# Altium PCB PCB.PcbDoc
Units mm, origin at the board's own origin, x right, y up, seen from the top; angles counter-clockwise.
Board outline 53.3 x 32.3 mm, 2 copper layers (Top Layer, Bottom Layer), stack 0.325 mm thick; 74 components, 38 nets, 206 pads, 99 vias.
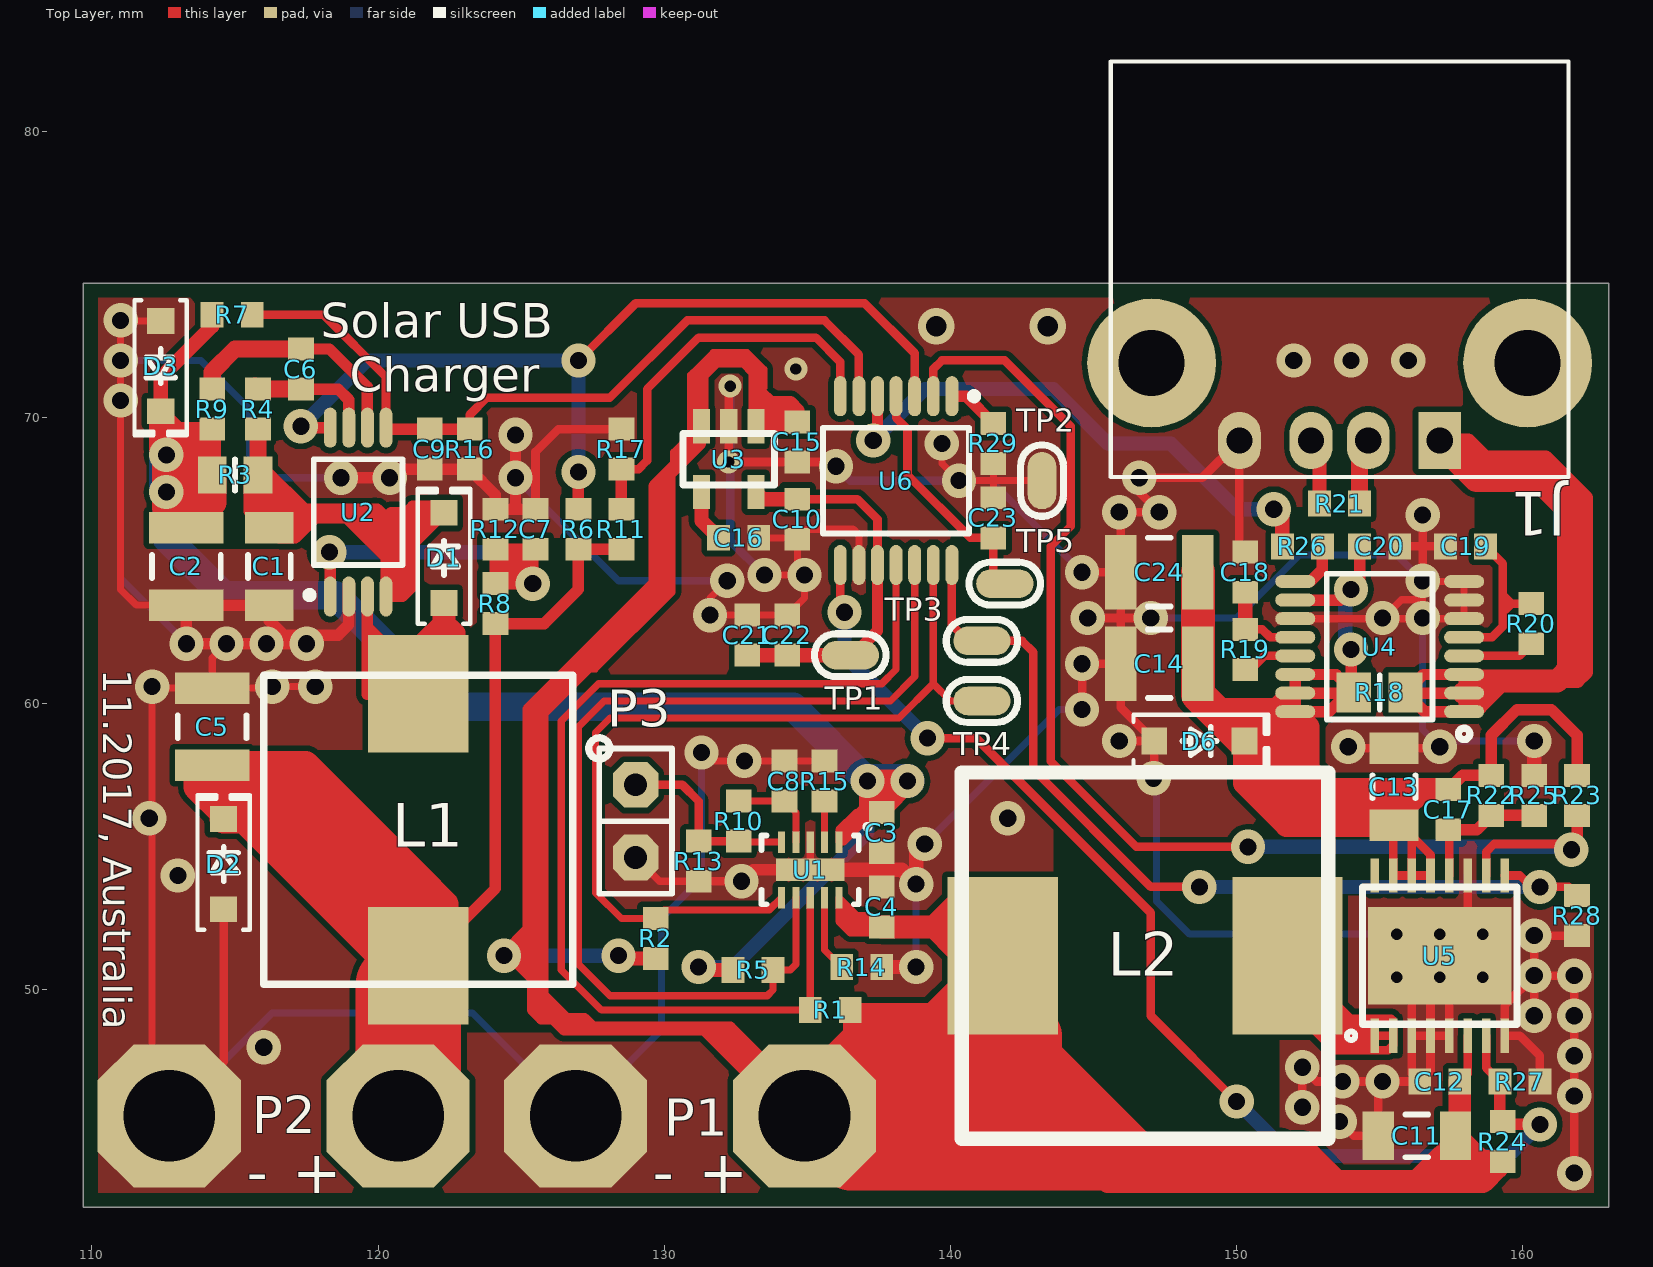
[diagram p0: Top Layer view]
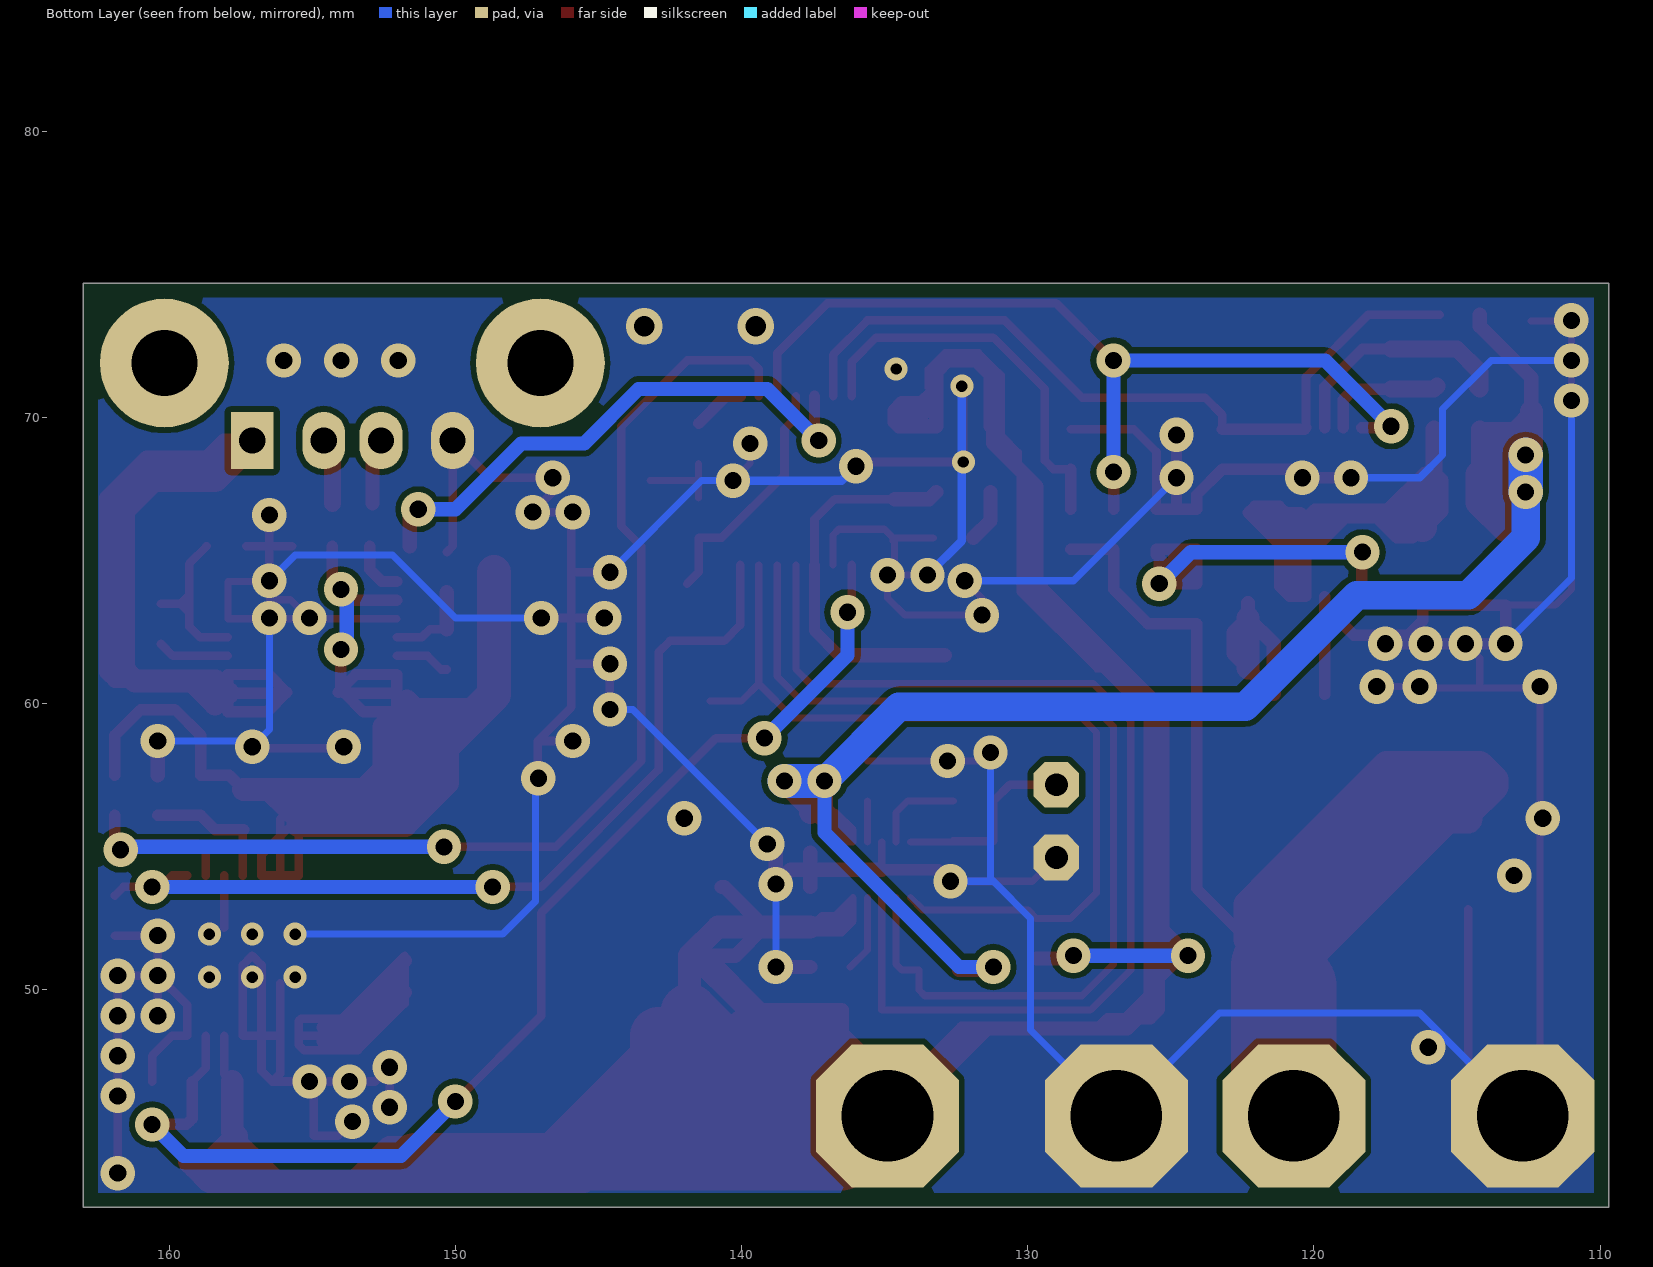
[diagram p1: Bottom Layer view, seen from below]

## Layer stack, top to bottom
Top Solder: solder mask 0.0102, Solder Resist, Dk 3.5
Top Layer: signal copper 0.0356
Dielectric 1: core 0.254, FR-4, Dk 4.2
Bottom Layer: signal copper 0.0356
Bottom Solder: solder mask 0.0102, Solder Resist, Dk 3.5

## Board outline
109.7,42.4 163,42.4 163,74.7 109.7,74.7

## Design rules (kind name [scope] priority, off if disabled: settings)
AssemblyTestPointUsage [All] p1 off:
AssemblyTestpoint [All] p1 off: testpointundercomponent=TRUE minsize=1.016 maxsize=2.54 preferedsize=1.524 minholesize=0 maxholesize=1.016 preferedholesize=0.813 testpointgrid=0.025 usegrid=TRUE gridtolerance=0 allowsidetop=TRUE allowsidebottom=TRUE
BoardOutlineClearance [All] p1: gap=0.5 ignorepadtopadclearanceinfootprint=FALSE
Clearance [All] p1: gap=0.2 ignorepadtopadclearanceinfootprint=TRUE except(0: Arc-Hole Track-Hole SMDPad-Hole THPad-Hole Via-Hole Fill-Hole Poly-Hole Region-Hole Text-Hole)
ComponentClearance ComponentClearance_R18 [InComponent('R18')] p1: gap=0 collisioncheckmode=3 verticalgap=0 showdistances=FALSE
ComponentClearance [All] p2: gap=0.25 collisioncheckmode=3 verticalgap=0.25 showdistances=FALSE
DiffPairsRouting [All] p1 off: maxlimit=0.254 minlimit=0.254 mostfreqgap=0.254 toplayer_minwidth=0.381 toplayer_maxwidth=0.381 toplayer_prefwidth=0.381 bottomlayer_minwidth=0.381 bottomlayer_maxwidth=0.381 bottomlayer_prefwidth=0.381 maxuncoupledlength=12.7
FabricationTestPointUsage [All] p1 off: valid=0 allowmultiple=FALSE
FabricationTestpoint [All] p1 off: side=3 testpointundercomponent=TRUE minsize=1.016 maxsize=2.54 preferedsize=1.524 minholesize=0 maxholesize=1.016 preferedholesize=0.813 testpointgrid=0.025 allowsidetop=TRUE allowsidebottom=TRUE usegrid=TRUE gridtolerance=0
FanoutControl Fanout_BGA [IsBGA] p1 off: bgadir=Out bgaviamode=Centered fanoutstyle=Auto fanoutdirection=Alternating viagrid=0.025 // Fanout_BGA (Default Rule)
FanoutControl Fanout_LCC [IsLCC] p2 off: bgadir=Out bgaviamode=Centered fanoutstyle=Auto fanoutdirection=Alternating viagrid=0.025 // Fanout_LCC (Default Rule)
FanoutControl Fanout_SOIC [IsSOIC] p3 off: bgadir=Out bgaviamode=Centered fanoutstyle=Auto fanoutdirection=Alternating viagrid=0.025 // Fanout_SOIC (Default Rule)
FanoutControl Fanout_Small [(CompPinCount < 5)] p4 off: bgadir=Out bgaviamode=Centered fanoutstyle=Auto fanoutdirection=OutThenIn viagrid=0.025 // Fanout_Small (Default Rule)
FanoutControl Fanout_Default [All] p5 off: bgadir=Out bgaviamode=Centered fanoutstyle=Auto fanoutdirection=Alternating viagrid=0.025 // Fanout_Default (Default Rule)
HoleSize [All] p1: absolutevalues=TRUE maxlimit=5 minlimit=0.4 maxpercent=80.000 minpercent=20.000
HoleToHoleClearance [All] p1: gap=0.5 allowstackedmicrovias=FALSE
MinimumAnnularRing [((ObjectKind = 'Pad') OR (ObjectKind = 'Via')) And (Layer = 'MultiLayer')] p1: minimumring=0.175
MinimumSolderMaskSliver [All] p1: minsoldermaskwidth=0.05
PermittedLayers [All] p1: toplayerpermitted=TRUE bottomlayerpermitted=FALSE
PlaneClearance [All] p1: clearance=0.25
PlaneConnect [All] p1: planeconnectstyle=Relief reliefexpansion=0.5 reliefentries=4 reliefconductorwidth=0.25 reliefairgap=0.25
PolygonConnect [All] p1: connectstyle=Direct reliefconductorwidth=0.254 reliefentries=4 polygonreliefangle="90 Angle" airgapwidth=0.254
RoutingCorners [All] p1: cornerstyle=45-Degree minsetback=2.5 maxsetback=2.5
RoutingVias [All] p1: holewidth=0.6 width=1.2 viastyle="Through Hole" minholewidth=0.4 minwidth=0.8 maxholewidth=1 maxwidth=2
SilkToSilkClearance [All] p1 off: silktosilkclearance=0.2
SilkToSolderMaskClearance [IsPad] p1 off: minsilkscreentomaskgap=0.2 clearancetoexposedcopper=TRUE
SolderMaskExpansion [All] p1: expansion=0.1
UnConnectedPin [All] p1:
UnRoutedNet [All] p1: checkbadconnections=TRUE
Width [All] p1: maxlimit=5 minlimit=0.2 preferedwidth=0.25
10 further rules are at their usual default settings.

## Components (designator, comment, footprint, x,y, rotation, side; value= is the part's Value field where it differs from the comment)
C1 "" C1206 116.2,64.8 r270 top value=4.7uF
C2 "" C1210 113.3,64.8 r270 top value=22uF
C3 "" 1608[0603] 137.6,55.5 r270 top value=1uF
C4 "" 1608[0603] 137.6,52.9 r90 top value=1uF
C5 "" C1210 114.2,59.2 r90 top value=22uF
C6 "" 1608[0603] 117.3,71.7 r270 top value=1uF
C7 "" 1608[0603] 125.5,66.1 r270 top value=100nF
C8 "" 1608[0603] 134.2,57.3 r270 top value=100nF
C9 "" 1608[0603] 121.8,68.9 r90 top value=1nF
C10 "" 1608[0603] 134.65,66.45 r270 top value=1uF
C11 "" C1206 156.3,44.9 r180 top value=10uF
C12 "" 1608[0603] 157.1,46.8 r180 top value=100nF
C13 "" C1206 155.5,57.1 r90 top value=2.2uF
C14 "Cap Pol1" C1210 147.3,61.4 r180 top value=150uF
C15 "" 1608[0603] 134.65,69.15 r90 top value=1uF
C16 "" 1608[0603] 132.6,65.8 r180 top value=100nF
C17 "" 1608[0603] 157.4,56.3 r90 top value=DNP
C18 "" 1608[0603] 150.3,64.6 r270 top value=100nF
C19 "" 1608[0603] 158,65.5 r0 top value=100nF
C20 "" 1608[0603] 155,65.5 r180 top value=100nF
C21 "" 1608[0603] 132.9,62.4 r90 top value=1uF
C22 "" 1608[0603] 134.3,62.4 r90 top value=100nF
C23 "" 1608[0603] 141.5,66.5 r270 top value=100nF
C24 "Cap Pol1" C1210 147.3,64.6 r180 top value=optional
D1 "D Schottky" SOD-123 122.3,65.1 r90 top value="(optional Schottky)"
D2 "D Zener" SOD-123 114.6,54.4 r90 top value="5.1V Zener"
D3 "D Zener" SOD-123 112.4,71.8 r270 top value="5.1V Zener"
D6 "D Zener" SOD-123 148.7,58.7 r0 top value="5.6V Zener"
J1 "USB B" USB 153.6,69.2 r90 top value=USBR-A-S-S-O-TH
L1 "Inductor" SRP1038A 121.4,55.6 r90 top value=10uH
L2 "Inductor" DR127 146.8,51.2 r0 top value=6.8uH
P1 "Battery single cell" BATTERY 130.9,45.6 r180 top
P2 "Solar Panel" SOLAR 116.7,45.6 r180 top
P3 "NTC Thermistor" Thermistor 129,55.9 r270 top
R1 "Res2" 1608[0603] 135.8,49.3 r0 top value=100k
R2 "Res2" 1608[0603] 129.7,51.8 r270 top value=100k
R3 "Res2" 6-0805_L 115,68 r180 top value="0.05R 1%"
R4 "Res2" 1608[0603] 115.8,70.3 r270 top value=1k
R5 "Res2" 1608[0603] 133.1,50.7 r0 top value=200k
R6 "Res2" 1608[0603] 127,66.1 r90 top value=100k
R7 "Res2" 1608[0603] 114.9,73.6 r180 top value="315k 1%"
R8 "Res2" 1608[0603] 124.1,63.5 r90 top value=100k
R9 "Res2" 1608[0603] 114.2,70.3 r270 top value=1k
R10 "Res2" 1608[0603] 132.6,55.9 r270 top value=TBD
R11 "Res2" 1608[0603] 128.5,66.1 r90 top value=TBD
R12 "Res2" 1608[0603] 124.1,66.1 r270 top value=DNP
R13 "Res2" 1608[0603] 131.2,54.5 r90 top value=DNP
R14 "Res2" 1608[0603] 136.9,50.8 r180 top value="4.7k 1%"
R15 "Res2" 1608[0603] 135.6,57.3 r270 top value="650R 1%"
R16 "Res2" 1608[0603] 123.2,68.9 r90 top value="125k 1%"
R17 "Res2" 1608[0603] 128.5,68.9 r90 top value=TBD
R18 "Res2" 6-0805_N 155,60.4 r180 top value=DNP
R19 "Res2" 1608[0603] 150.3,61.9 r90 top value=1k
R20 "Res2" 1608[0603] 160.3,62.8 r270 top value=1k
R21 "Res2" 1608[0603] 153.6,67 r180 top value=200R
R22 "Res2" 1608[0603] 158.9,56.8 r90 top value=DNP
R23 "Res2" 1608[0603] 161.9,56.8 r90 top value=1.96M
R24 "Res2" 1608[0603] 159.3,44.7 r270 top value="1.96M 1%"
R25 "Res2" 1608[0603] 160.4,56.8 r270 top value=DNP
R26 "Res2" 1608[0603] 152.3,65.5 r180 top value=1k
R27 "Res2" 1608[0603] 159.9,46.8 r180 top value="390k 1%"
R28 "Res2" 1608[0603] 161.9,52.6 r90 top value=100k
R29 "Res2" 1608[0603] 141.5,69.1 r90 top value=100k
TP1 "VDD" "Testpoint 1x2mm" 136.5,61.7 r90 top
TP2 "GND" "Testpoint 1x2mm" 143.2,67.8 r0 top
TP3 "SWCLK" "Testpoint 1x2mm" 141.1,62.2 r90 top
TP4 "SWDIO" "Testpoint 1x2mm" 141.1,60.1 r270 top
TP5 "NRST" "Testpoint 1x2mm" 141.9,64.2 r270 top
U1 "*" BQ24210 135.1,54.2 r270 top value=BQ24210
U2 "SPV1040" SPV1040 119.3,66.7 r90 top
U3 "LDK120" LDK120-SOT23-5L 132.25,68.55 r180 top value=LDK120M25R
U4 "INA250" INA250 155,62 r180 top value=INA2504A
U5 "TPS61032" TPS6103XPWP 157.1,51.2 r0 top value=TPS61032PWP
U6 "STM32L011x3" STM32L011x3 138.1,67.8 r270 top value=STM32L011D3

## Footprints (in the part's own frame and the unit in brackets; to place one, negate y for a bottom-side part, rotate by r counter-clockwise, add the part's x,y. Pads: shape width x height; smd on the part's side, far side on the other; paste and mask are expansions set on the pad)
6-0805_L [mm] "Chip Resistor, Body 2.0x1.2mm, IPC High Density"
  rect 1x1.3 smd: 1(-0.8,0) 2(0.8,0)
  silkscreen extent 0,-0.55 0,0.55, body extent -1.07,-0.7 1.07,0.7, height 0.7
6-0805_N [mm] "Chip Resistor, Body 2.0x1.2mm, IPC Medium Density"
  rect 1.2x1.4 smd paste-100: 1(-0.9,0) 2(0.9,0)
  silkscreen extent 0,-0.6 0,0.6, body extent -1.07,-0.7 1.07,0.7, height 0.7
1608[0603] [mm] "Chip Capacitor, Body 1.6x0.8mm, IPC High Density"
  rect 0.8x0.9 smd: 1(-0.7,0) 2(0.7,0)
  body extent -0.87,-0.48 0.87,0.48, height 1.3
BATTERY [mm]
  oct 5x5 hole 3.2: 1(-4,0) 2(4,0)
BQ24210 [mm] "WSON, 10-Leads, Body 3.00x2.00mm, Pitch 0.50mm, Thermal Pad 2.40x0.79mm, IPC Medium Density"
  rect 0.75x0.25 smd: 1(-0.97,1) 2(-0.97,0.5) 3(-0.97,0) 4(-0.97,-0.5) 5(-0.97,-1) 6(0.97,-1) 7(0.97,-0.5) 8(0.97,0) 9(0.97,0.5) 10(0.97,1)
  rect 0.79x2.4 smd paste-0.06: PAD(0,0)
  silkscreen extent -1.6,-1.7 1.2,2.1, body extent -1.05,-1.55 1.05,1.55, height 0.8
C1206 [mm] "Chip Capacitor, Body 3.2x1.6mm, IPC High Density"
  rect 1.1x1.7 smd: 1(-1.35,0) 2(1.35,0)
  silkscreen extent -0.4,-0.75 0.4,0.75, body extent -1.7,-0.9 1.7,0.9, height 1.3
C1210 [mm] "Chip Capacitor, Body 3.2x2.5mm, IPC High Density"
  rect 1.1x2.6 smd: 1(-1.35,0) 2(1.35,0)
  silkscreen extent -0.4,-1.2 0.4,1.2, body extent -1.7,-1.35 1.7,1.35, height 1.3
DR127 [mm]
  rect 3.85x5.5 smd paste-0.2: 1(-4.975,0) 2(4.975,0)
  silkscreen extent -6.4,-6.4 6.4,6.4, body extent -6.25,-6.25 6.25,6.25, height 8
INA250 [mm] "TTSOP, 16-Leads, Body 5.00x4.40mm, Pitch 0.65mm, IPC Medium Density"
  oval 1.4x0.45 smd: 1(-2.95,2.275) 2(-2.95,1.625) 3(-2.95,0.975) 4(-2.95,0.325) 5(-2.95,-0.325) 6(-2.95,-0.975) 7(-2.95,-1.625) 8(-2.95,-2.275) 9(2.95,-2.275) 10(2.95,-1.625) 11(2.95,-0.975) 12(2.95,-0.325) 13(2.95,0.325) 14(2.95,0.975) 15(2.95,1.625) 16(2.95,2.275)
  silkscreen extent -3.15,-2.55 1.85,3.25, body extent -2.25,-2.55 2.25,2.55, height 1.2
LDK120-SOT23-5L [mm]
  rect 0.6x1.2 smd: 1(-0.95,-1.15) 2(0,-1.15) 3(0.95,-1.15) 4(0.95,1.15) 5(-0.95,1.15)
  silkscreen extent -1.6,-0.9 1.6,0.9, body extent -1.48,-0.8 1.47,0.8, height 1.45
SOD-123 [mm] "SOD, 2-Leads, Body 1.55x3.70mm, IPC Medium Density"
  rect 0.9x0.95 smd: 1(-1.575,0) 2(1.575,0)
  silkscreen extent -2.3,-0.92 2.41,0.92, body extent -1.86,-0.78 1.86,0.77, height 1.35
SOLAR [mm]
  oct 5x5 hole 3.2: 1(-4,0) 2(4,0)
SPV1040 [mm] "TSSOP8; 8-Leads, Body 3.00x4.40mm, Pitch 0.65mm, IPC Medium Density"
  oval 1.4x0.45 smd: 1(-2.95,0.975) 2(-2.95,0.325) 3(-2.95,-0.325) 4(-2.95,-0.975) 5(2.95,-0.975) 6(2.95,-0.325) 7(2.95,0.325) 8(2.95,0.975)
  silkscreen extent -3.02,-1.55 1.85,1.82, body extent -2.25,-1.55 2.25,1.55, height 1.2
SRP1038A [mm]
  rect 4.1x3.5 smd paste-0.2: 1(-4.75,0) 2(4.75,0)
  silkscreen extent -5.4,-5.4 5.4,5.4, body extent -5.15,-5.15 5.15,5.15, height 4
STM32L011x3 [mm] "TSSOP14, 14-Leads, Body 5.00x4.40mm, Pitch 0.65mm, IPC Medium Density"
  oval 1.4x0.45 smd: 1(-2.95,1.95) 2(-2.95,1.3) 3(-2.95,0.65) 4(-2.95,0) 5(-2.95,-0.65) 6(-2.95,-1.3) 7(-2.95,-1.95) 8(2.95,-1.95) 9(2.95,-1.3) 10(2.95,-0.65) 11(2.95,0) 12(2.95,0.65) 13(2.95,1.3) 14(2.95,1.95)
  silkscreen extent -3.07,-2.55 1.85,2.85, body extent -2.25,-2.55 2.25,2.55, height 1.2
"Testpoint 1x2mm" [mm]
  oval 1x2 smd paste-100: 1(0,0)
  silkscreen extent -0.75,-1.25 0.75,1.25
Thermistor [mm]
  oct 1.6x1.6 hole 0.8: 1(-1.27,0) 2(1.27,0)
  silkscreen extent -2.54,-1.27 2.54,1.27
TPS6103XPWP [mm]
  rect 0.3x1.2 smd: 1(-2.275,-2.8) 2(-1.625,-2.8) 3(-0.975,-2.8) 4(-0.325,-2.8) 5(0.325,-2.8) 6(0.975,-2.8) 7(1.625,-2.8) 8(2.275,-2.8) 9(2.275,2.8) 10(1.625,2.8) 11(0.975,2.8) 12(0.325,2.8) 13(-0.325,2.8) 14(-0.975,2.8) 15(-1.625,2.8) 16(-2.275,2.8)
  rect 5x3.4 smd paste-100: PAD(0,0)
  silkscreen extent -3.25,-2.95 2.7,2.4, body extent -2.55,-2.25 2.55,2.25, height 1.45
USB [mm]
  round 4.5 hole 2.3 paste-1.67: 0(2.71,6.57) 0(2.71,-6.57)
  rect 2x1.5 hole 0.92 paste-1.67: 1(0,-3.5)
  oval 2x1.5 hole 0.92 paste-1.67: 2(0,-1) 3(0,1) 4(0,3.5)
  silkscreen extent -1.27,-8 13.25,8, body extent -1.15,-7.85 13.15,7.85, height 7.65

## Part data
C1 C2 C3 C4 C5 C6 C7 C8 C9 C10 C11 C12 C13 C15 C16 C17 C18 C19 C20 C21 C22 C23: library part Cap, "Capacitor"
C14 C24: "Polarized Capacitor"
D1: "Schottky Diode"
D2 D3 D6: "Zener Diode"
J1: library part "USB 2.0 Type B", Farnell code=1753808, Link farnell=http://au.element14.com/samtec/usbr-a-s-s-o-th/usb-2-0-type-a-receptacle-th/dp/1753808
L1: Manufacturer=Bourns, Info=SRP1038A-100M, Mouser link=http://au.mouser.com/ProductDetail/Bourns/SRP1038A-100M/
P1 P2 P3: library part "Header 2", "Header, 2-Pin", LatestRevisionDate=17-Jul-2002, LatestRevisionNote="Re-released for DXP Platform.", Publisher="Altium Limited"
R1 R2 R3 R4 R5 R6 R7 R8 R9 R10 R11 R12 R13 R14 R15 R16 R17 R18 R19 R20 R21 R22 R23 R24 R25 R26 R27 R28 R29: "Resistor"
  R3: Info="min. 100mW"
TP1 TP2 TP3 TP4 TP5: library part Testpoint, "Testpoint for measuring at the PCB"
U1: library part BQ24210, "800-mA, Single-Input, Single-Cell Li-Ion Battery Solar Charger", Manufacturer="Texas Instruments", Link mouser=http://www.mouser.com/ProductDetail/Texas-Instruments/BQ24210DQCT/
U2: Manufacturer=STM, Link mouser=http://www.mouser.de/ProductDetail/STMicroelectronics/SPV1040TTR/
U3: "200 mA low quiescent current very low noise LDO", Manufacturer=ST, Info="Pinout for SOT23-5L, SOT323-5L only!", Mouser link=http://au.mouser.com/ProductDetail/STMicroelectronics/LDK120M25R/
U4: "36-V, Low- or High-Side, Bidirectional, Zero-Drift  Current-Shunt Monitor with Precision Integrated Shunt Resistor", Manufacturer="Texas Instruments", Mouser link=http://au.mouser.com/ProductDetail/Texas-Instruments/INA250A4PWR/, Note="Applies to INA250A1, INA250A2, INA250A3, INA250A4"
U5: "Efficient Synchronous Boost Converter With 4A Switch", Manufacturer="Texas Instruments", Mouser link=http://au.mouser.com/ProductDetail/Texas-Instruments/TPS61032PWPR/
U6: "MCU", Manufacturer=ST, Info="only TSSOP14 footprint", Mouser link=http://au.mouser.com/ProductDetail/STMicroelectronics/STM32L011D3P6TR/
L2: Info=DR127-6R8-R, Mouser link=http://au.mouser.com/ProductDetail/Eaton/DR127-6R8-R/

## Via types
v1: diameter 1.2, hole 0.6, Top Layer to Bottom Layer, tented top, 37 vias
v2: diameter 1.2, hole 0.6, Top Layer to Bottom Layer, tented both sides, 28 vias
v3: diameter 1.2, hole 0.6, Top Layer to Bottom Layer, 23 vias
v4: diameter 0.8, hole 0.4, Top Layer to Bottom Layer, tented top, 5 vias
v5: diameter 0.8, hole 0.4, Top Layer to Bottom Layer, 3 vias
v6: diameter 1.27, hole 0.711, Top Layer to Bottom Layer, tented both sides, 2 vias
v7: diameter 0.8, hole 0.4, Top Layer to Bottom Layer, tented both sides, 1 vias

## Nets (pads, with @x,y where several pads share a name; then routed paths per layer and width w, separated by ;. In a path a pad name is that pad's centre, name@x,y a point inside that pad or via, vN(x,y) a via of type N, cw(c..) or ccw(c..) an arc to the next point about the centre after c; other vN are vias at no path point)
2.5V: C10.1 C21.1 C22.1 TP1.1 U3.5 U6.10 | length 13.4
  Top Layer w0.3: C10.1 136.75,67.15 137.45,66.45 U6.10
  Top Layer w0.4: TP1.1 136.6,61.7 137.45,62.55 U6.10
  Top Layer w0.5: C21.1 C22.1 TP1.1 ; U3.5 133.45,67.15 C10.1
5V: C13.1 C14.1 C17.2 C20.2 C24.1 D6.2 R18.2 R22.2 R23.2 U4.10 U4.14 U4.15 U4.16 U5.13 U5.14 U5.15 | length 68.9
  Top Layer w0.3: 155.8,56.3 156.125,55.975 C13.1@156.125,55.375 ; U5.14 U5.15 155.475,55.725 C13.1 155.75,55.75 C13.1@156.125,55.375 ; U5.14 U5.13 156.775,54.725 C13.1@156.125,55.375 ; U5.14 C13.1@156.125,55.375
  Top Layer w0.4: U4.10 153.625,63.625 v3(154,64) 154.3,64.3 C20.2 ; v3(154,61.9) R18.2@154,60.5 ; R18.2 R18.2@154,60.5 ; C17.2 157.9,57.5 R22.2 158.9,58.9 159.8,59.8 161,59.8 161.9,58.9 R23.2 ; U4.15 U4.16 153.225,59.725 R18.2@153.875,60.375 ; U4.15 U4.14 153.475,61.025 R18.2@154,60.5 ; U4.15 R18.2@153.875,60.375 ; R18.2@153.875,60.375 R18.2@154,60.5
  Top Layer w0.8: 149.137,59.837 149.175,59.8 150.5,59.8 ; D6.2 150.275,57.225 151.75,55.75 C13.1 155.5,56 155.8,56.3 ; 151.7,60.1 151.4,59.8 150.5,59.8 ; 152.5,59.2 152.5,57.7 153.2,57 156.5,57 ; C17.2 156.5,57 ; 150.5,59.8 150.9,59.4 ; 150.9,59.4 150.9,57.5 152.1,56.3 153,56.3 ; 150.9,59.4 152,59.4 151.7,59.1 151.7,57.6 153,56.3 ; 153,56.3 155.8,56.3 ; 155.8,56.3 156.5,57
  Top Layer w1.2: C24.1 C14.1 148.65,60.325 149.137,59.837 ; 149.175,59.8 D6.2
  Bottom Layer w0.5: v3(154,61.9) 153.8,62.1 153.8,63.8 v3(154,64)
GND: C1.2 C2.2 C3.2 C4.2 C5.2 C7.1 C8.1 C9.1 C10.2 C11.2 C12.2 C13.2 C14.2 C15.1 C16.1 C18.1 C19.1 C20.1 C21.2 C22.2 C23.1 C24.2 D2.1 D3.1 D6.1 J1.4 P1.2 P2.2 P3.2 R12.1 R13.1 R14.1 R15.1 R16.1 R17.2 R25.1 R27.1 R28.1 R29.1 TP2.1 U1.3 U1.PAD U2.2 U3.2 U4.6 U4.7 U4.8 U4.11 U5.3 U5.4 U5.5 U5.8 U5.11 U5.PAD U6.9 | length 329.6
  Top Layer w0.25: D3.1 111.025,73.375 v1(111,73.4) v1(111,72) v1(111,70.6) 111,64 111.55,63.45 C2.2 ; P2.2 112.1,46.2 v1(112.1,60.6) 112.15,60.55 C5.2 ; v2(114.7,62.1) 114.2,61.6 C5.2 ; v1(117.8,60.6) v1(116.3,60.6) 116.25,60.55 C5.2 ; P3.2 129.83,53.8 R13.1 ; v1(131.3,58.3) 131.6,58 v1(132.8,58) C8.1 R15.1 ; v2(132.2,64.3) 131.6,63.7 v1(131.6,63.1) C21.2 C22.2 134.9,63.7 v1(134.9,64.5) ; C16.1 134.6,65.8 C10.2 ; v2(133.5,64.5) v1(134.9,64.5) ; C10.2@134.7,65.7 C10.2 ; U1.PAD U1.3 ; U6.9 136.8,65.9 136.6,66.1 135,66.1 C10.2 ; v2(139.7,69.1) 139.7,68.4 v2(140.3,67.8) 141.5,67.8 ; C23.1 141.5,67.8 ; R29.1 141.5,67.8 ; TP2.1 141.5,67.8 ; U4.11 v2@155.1,62.975 ; C10.2 134.65,64.75 v1(134.9,64.5) ; v2@155.1,62.975 v2@156.5,62.975 ; v2@155.1,62.975 155.762,63.637 156.5,63.637 ; v2@156.5,62.975 U4.6 U4.7 U4.8 156.525,64.275 v2(156.5,64.3) 156.5,63.637 ; v2@156.5,62.975 v2(156.5,63) 156.5,63.637
  Top Layer w0.3: P2.2 114.6,47.5 D2.1 ; C7.1 125.5,68.8 126.3,69.6 R17.2 ; R13.1 v1(132.7,53.8) ; v4(132.3,71.1) 132.25,71.05 U3.2 v7(132.25,68.45) C15.1 135.85,68.45 v1(136,68.3) ; v1(144.6,59.8) v1(144.6,61.4) C14.2 ; v1(144.6,64.6) C24.2 ; v1(144.8,63) 145.95,63 ; v1(145.9,58.7) D6.1 ; v1(147,63) 145.95,63 ; v1(147.1,57.4) 147.125,57.425 D6.1 ; C18.1 150.1,65.5 J1.4 148.8,67.9 v1(146.6,67.9) 146.6,67.4 v2(147.3,66.7) v2(145.9,66.7) 145.95,66.65 C24.2 ; v2(152.3,45.9) v2(152.3,47.3) 152.8,46.8 v2(153.7,46.8) v1(155.1,46.8) ; v2(153.6,45.4) 154.1,44.9 C11.2 154.95,46.65 v1(155.1,46.8) ; v1(153.9,58.5) 153.95,58.45 C13.2 157.05,58.45 v1(157.1,58.5) ; C20.1 156.5,65.5 ; U5.PAD@156.125,50.225 U5.3 ; v2(156.5,64.3) 156.5,65.5 ; v1(156.5,66.6) 156.5,65.5 ; C19.1 156.5,65.5 ; U5.PAD@158.075,52.175 U5.11 ; v2(160.4,49.1) v1(160.4,50.5) ; R27.1 160.6,47.7 159.9,48.4 U5.8 159.375,49.475 v1(160.4,50.5) ; v1(161.8,43.6) v1(161.8,46.3) v2(161.8,47.7) v1(161.8,49.1) v2(161.8,50.5) v1(160.4,50.5) ; R28.1 v2(160.4,51.9) v1(160.4,50.5) ; C14.2 145.95,59.875 D6.1 ; C14.2 145.95,63 ; 145.95,63 C24.2 ; v1(155.1,46.8) C12.2 ; U5.3 156.125,47.075 C12.2 ; U5.3 U5.4 ; C12.2 156.775,47.175 U5.4 ; U5.4 156.775,50.875 U5.PAD 157.425,50.875 U5.5 U5.4
  Top Layer w0.4: v2(117.5,62.1) v2(116.1,62.1) v2(114.7,62.1) v1(113.3,62.1) C2.2 C1.2 116.2,62.9 116.7,62.4 118.6,62.4 118.975,62.775 U2.2 ; v1(118.7,67.9) v1(120.4,67.9) 120.7,68.2 C9.1 R16.1 124.1,67.3 R12.1 124.8,66.8 ; v1(124.8,69.4) v1(124.8,67.9) 124.8,66.8 ; C7.1 124.8,66.8 ; v1(132.7,53.8) 133.1,54.2 U1.PAD
  Top Layer w0.5: U1.PAD 137.6,54.2 ; R14.1 v1(138.8,50.8) ; C4.2 137.6,54.2 ; C3.2 137.6,54.2 ; v1(139.1,55.1) 138.8,54.8 v2(138.8,53.7) 138.3,54.2 137.6,54.2 ; R25.1 v1(160.4,58.7)
  Bottom Layer w0.25: v1(111,70.6) 111,64.4 v1(113.3,62.1) ; v1(111,72) 113.8,72 115.5,70.3 115.5,68.7 116.3,67.9 v1(118.7,67.9) ; P2.2 116.3,49.2 123.3,49.2 P1.2 129.9,48.6 129.9,52.5 131.2,53.8 ; v1(124.8,67.9) 128.4,64.3 v2(132.2,64.3) ; v1(131.3,58.3) 131.3,53.9 131.2,53.8 ; v1(132.7,53.8) 131.2,53.8 ; v1(138.8,50.8) v2(138.8,53.7) ; v1(139.1,55.1) 143.8,59.8 v1(144.6,59.8) ; v2(139.7,69.1) v2@139.8,69 ; v2(140.3,67.8) 141.4,67.8 v1(144.6,64.6) ; v1(147,63) 150,63 152.2,65.2 155.6,65.2 v2(156.5,64.3) ; v1(147.1,57.4) 147.2,57.3 147.2,53.1 148.35,51.95 v4(155.6,51.95) ; v2(156.5,63) 156.5,59.1 v1(157.1,58.5) 157.3,58.7 v1(160.4,58.7)
  Bottom Layer w0.3: v4(132.3,71.1) 132.3,65.7 v2(133.5,64.5) ; v1(136,68.3) 136.5,67.8 v2(140.3,67.8)
  other v2: 116,48 113,54 112,56 142,56 155.1,63 152,72 154,72 156,72
  other v4: 155.6,50.45 158.6,50.45 158.6,51.95
  other v5: 157.1,50.45 157.1,51.95 134.6,71.7
  other v6: 139.5,73.2 143.4,73.2
NetC1_1: C1.1 D1.2 R3.1 R4.2 U2.4 | length 40.9
  Top Layer w0.4: R3.1 R3.1@116.2,67.6 ; 116.2,66.8 117.3,66.8 119.8,66.8 ; 120.5,66.1 120.188,66.413 ; 120.6,66.3 120.975,66.675 ; 120.8,64.1 120.8,65.7 121.775,66.675 ; 121.2,66.4 120.563,65.763 120.563,63.75 ; C1.1 116.55,66.5 117.8,66.5 ; C1.1 117.45,66.15 ; C1.1 116.55,65.8 117.1,65.8 117.45,66.15 ; 117.45,66.15 117.8,66.5 ; 117.8,66.5 118.9,66.5 ; 118.9,66.5 120.275,65.125 ; 118.9,66.5 119.2,66.5 ; 119.2,66.5 120.275,65.425 ; 119.2,66.5 119.7,66.5 119.988,66.213 ; 119.8,66.8 119.975,66.8 120.275,66.5 ; 119.8,66.8 120.188,66.413 ; 119.988,66.213 120.275,65.925 120.275,65.425 ; 119.988,66.213 120.188,66.413 ; 120.188,66.413 120.275,66.5 ; 120.275,65.125 U2.4 120.563,63.75 ; 120.275,65.125 120.275,65.425 ; 120.275,66.5 120.45,66.675 120.975,66.675 ; 120.563,63.75 120.85,63.75 121.2,64.1 121.2,65.575 D1.2 ; 120.975,66.675 121.775,66.675 ; 120.975,66.675 121.2,66.9 122.075,66.9 D1.2 ; 121.775,66.675 D1.2
  Top Layer w0.6: R4.2 R3.1 ; C1.1 115.6,66.75 115.6,67.8 R3.1 ; 117.3,66.8 116.1,68 R3.1
  Top Layer w1: C1.1 116.2,66.8 R3.1@116.2,67.6
NetC5_1: C5.1 D2.2 L1.1 P2.1 R6.1 R8.1 R11.1 | length 78.2
  Top Layer w0.4: L1.1 122.3,51.75 124.1,53.55 R8.1 125.8,62.8 127,64 R6.1 R11.1
  Top Layer w1: L1.1@120.7,50.15 L1.1@120.7,50.85 ; L1.1@122.3,51.75 122.3,53 121.4,53.9 ; C5.1 C5.1@114.6,57.45 ; C5.1 117.45,57.85 121.4,53.9 ; C5.1 113.7,57.35 113.7,57.1 D2.2@114.6,56.2 ; D2.2@114.6,56.2 D2.2 115.325,55.975 ; D2.2@114.6,56.2 114.6,56.713 ; 114.6,56.713 115.987,56.713 116.725,55.975 ; 114.6,56.713 C5.1@114.6,57.45 ; C5.1@114.6,57.45 116.45,57.45 L1.1@121.4,52.5 ; 115.325,55.975 120.45,50.85 L1.1@120.7,50.85 ; 115.325,55.975 116.725,55.975 ; 116.725,55.975 120.7,52 L1.1@120.7,50.85 ; L1.1@120.7,50.85 L1.1 L1.1@121.4,52.5 ; L1.1@121.4,52.5 121.4,53.9
  Top Layer w3: P2.1 120.7,50.15 L1.1 121.4,46.3 P2.1
NetC6_1: C6.1 R9.1 U2.6 | length 8.5
  Top Layer w0.4: C6.1 118.3,72.4 119.625,71.075 U2.6
  Top Layer w0.6: R9.1@114.3,71.1 R9.1 114.2,71.6 115,72.4 C6.1
NetC6_2: C6.2 R4.1 U2.7 | length 4.4
  Top Layer w0.4: C6.2 118.6,71 118.975,70.625 U2.7
  Top Layer w0.6: R4.1@115.7,71.1 R4.1 C6.2
NetC7_2: C7.2 R8.2 R12.2 U2.1 | length 17.7
  Top Layer w0.4: v3(118.3,65.3) 118.325,65.275 U2.1 ; 125.1,64.8 C7.2@125.4,65.1 ; R8.2 R12.2 R12.2@124.5,65.4 ; R8.2 124.5,64.6 R12.2@124.5,65.4 ; R8.2 R8.2@124.5,64.2 ; R8.2@124.5,64.2 124.9,64.6 124.9,65.4 ; R8.2@124.5,64.2 v3(125.4,64.2) C7.2@125.4,65.1 ; R12.2@124.5,65.4 124.9,65.4 ; 124.9,65.4 C7.2@125.4,65.4 ; C7.2@125.4,65.1 C7.2@125.4,65.4 ; C7.2@125.4,65.1 125.5,65.2 C7.2 C7.2@125.4,65.4
  Bottom Layer w0.5: v3(118.3,65.3) 124.3,65.3 v3(125.4,64.2)
NetC8_2: C8.2 R10.1 U1.4 | length 3.2
  Top Layer w0.25: R10.1 C8.2 134.6,56.2 U1.4
NetC9_2: C9.2 R7.1 R16.2 U2.5 U6.6 | length 27.7
  Top Layer w0.3: R7.1 118.1,73.6 120.275,71.425 U2.5 ; R16.2 123.2,70.1 123.8,70.7 128.1,70.7 130.8,73.4 135.6,73.4 136.8,72.2 U6.6
  Top Layer w0.4: U2.5 120.325,69.6 C9.2 R16.2
NetC16_2: C16.2 U3.4 | length 1.8
  Top Layer w0.5: U3.4 131.3,66.4 C16.2
NetC17_1: C17.1 R22.1 R25.2 U5.12 | length 4.8
  Top Layer w0.3: C17.1 157.425,55.575 U5.12
  Top Layer w0.4: C17.1 158.4,55.6 R22.1 R25.2
NetC18_2: C18.2 R19.2 U4.12 | length 3.2
  Top Layer w0.3: R19.2 150.9,62.6 151.175,62.325 U4.12
  Top Layer w0.5: R19.2 C18.2
NetC19_2: C19.2 R20.1 U4.5 | length 6.1
  Top Layer w0.3: U4.5 158.925,62.325 159.3,62.7 159.3,63.2 ; C19.2 159.3,64.9 159.3,63.8 ; R20.1 159.6,63.5 ; 159.3,63.2 159.3,63.8 ; 159.3,63.2 159.6,63.5 ; 159.3,63.8 159.6,63.5
NetC23_2: C23.2 TP5.1 U6.4 | length 8.6
  Top Layer w0.3: U6.4 138.1,70 138.5,69.6 138.5,68 140.7,65.8 C23.2 141.5,64.6 TP5.1
NetD1_1: D1.1 L1.2 U2.3 | length 14.7
  Top Layer w0.4: 119.625,60.325 119.625,62.675 ; U2.3 119.625,62.675 ; L1.2 121.4,60.9 119.625,62.675
  Top Layer w0.5: L1.2 122.3,61.25 122.8,61.75 122.8,62.5 122.3,63 ; L1.2@121.4,60.9 121.4,62.1 122.3,63 ; D1.1 122.3,63
  Top Layer w0.8: L1.2@122.3,61.25 122.3,63
NetJ1_1: J1.1 R18.1 U4.1 U4.2 U4.3 | length 37.5
  Top Layer w0.4: R18.1@155.925,60.375 U4.2 ; R18.1@155.925,60.375 R18.1 156.525,61.025 U4.3 U4.2 ; R18.1@155.925,60.375 156.575,59.725 U4.1 U4.2
  Top Layer w0.5: J1.1 158.1,69.2 158.7,68.6 160.8,68.6 162.2,67.2 162.2,61.1 161.9,60.8 161.2,60.8
  Top Layer w0.8: U4.2 158.375,60.8 159.2,60.8 ; 158.4,60 159.2,60.8 ; 161.7,61.3 161.2,60.8 159.2,60.8
  Top Layer w1: J1.1 158.4,67.9 160.6,67.9 161.7,66.8 161.7,61.3
NetJ1_2: J1.2 R21.1 | length 2.3
  Top Layer w0.6: R21.1 154.3,68.9 J1.2
NetJ1_3: J1.3 R21.2 | length 2.3
  Top Layer w0.5: J1.3 152.9,68.9 R21.2
NetL2_2: L2.2 U5.1 U5.2 | length 26.7
  Top Layer w0.3: L2.2@151.775,50.325 153.7,48.4 154.1,48.4 ; L2.2@151.775,50.325 L2.2@151.775,50.725 ; L2.2@151.775,50.325 151.775,49.925 151.775,49.525 153.4,47.9 155.3,47.9 155.475,48.075 U5.2 ; L2.2@151.775,50.725 154.1,48.4 ; L2.2@151.775,50.725 151.775,51.025 L2.2 153.975,49 155.4,49 155.475,48.925 U5.2 ; 154.1,48.4 U5.1 U5.2
  Top Layer w0.5: L2.2@151.775,49.925 153.5,48.2 154.6,48.2 ; L2.2@151.775,51.025 154.1,48.7 154.6,48.7
NetP3_1: P3.1 R10.2 R13.2 U1.5 | length 6.7
  Top Layer w0.25: R10.2 132.63,55.17 U1.5
  Top Layer w0.3: P3.1 130.63,57.17 131.2,56.6 R13.2 R10.2
NetR1_1: R1.1 U1.8 U6.11 | length 38
  Top Layer w0.25: U1.8 R1.1 129,49.3 127.8,49.3 126.4,50.7 126.4,59.4 127.7,60.7 137.6,60.7 138.1,61.2 U6.11
NetR2_1: R2.1 TP4.1 U1.6 U6.13 | length 31.4
  Top Layer w0.25: U1.6 133.67,52.8 130,52.8 R2.1 128.5,52.5 127.6,53.4 127.6,59 128.1,59.5 138.2,59.5 139.4,60.7 ; U6.13 139.4,60.7 ; TP4.1 140,60.1 139.4,60.7
NetR5_2: R5.2 U1.7 U6.12 | length 35.9
  Top Layer w0.25: U1.7 134.6,50.9 134.4,50.7 R5.2 133.8,50 133.6,49.8 128.1,49.8 127,50.9 127,59.2 127.9,60.1 137.9,60.1 138.75,60.95 U6.12
NetR6_2: R6.2 U2.8 U6.3 | length 31.7
  Top Layer w0.3: v3(127,72) 129,74 137,74 138.75,72.25 U6.3
  Top Layer w0.4: v3(117.3,69.7) 117.35,69.65 U2.8 ; R6.2 v3(127,68.1)
  Bottom Layer w0.5: v3(117.3,69.7) 119.6,72 v3(127,72) v3(127,68.1)
NetR11_2: R11.2 R17.1 U6.7 | length 14
  Top Layer w0.3: R17.1 129.1,68.2 129.4,68.5 129.4,71 131.2,72.8 135.3,72.8 136.15,71.95 U6.7
  Top Layer w0.4: R11.2 R17.1
NetR14_2: R14.2 U1.9 | length 2.7
  Top Layer w0.25: U1.9 135.6,51.4 R14.2
NetR15_2: R15.2 U1.2 | length 1.4
  Top Layer w0.25: U1.2 R15.2
NetR19_1: R19.1 U4.13 | length 1.9
  Top Layer w0.3: R19.1 150.5,61.2 150.975,61.675 U4.13
NetR20_2: R20.2 U4.4 | length 2.5
  Top Layer w0.3: U4.4 159.875,61.675 R20.2
NetR23_1: R23.1 U5.10 U6.2 | length 43.6
  Top Layer w0.3: U6.2 139.4,71.7 139.7,72 141.9,72 144.2,69.7 144.2,66.2 143.5,65.5 143.5,58 146.5,55 v3(150.4,55) ; U5.10 158.725,54.825 159,55.1 161.5,55.1 v3(161.7,54.9)
  Top Layer w0.4: v3(161.7,54.9) 161.9,55.1 R23.1
  Bottom Layer w0.5: v3(150.4,55) 161.6,55 v3(161.7,54.9)
NetR24_1: R24.1 R27.2 U5.7 U6.8 | length 41.9
  Top Layer w0.3: U6.8 136.15,63.35 v3(136.3,63.2) ; v3(139.2,58.8) 140.9,58.8 147,52.7 147,49.1 v3(150,46.1) ; U5.7 158.725,47.275 R27.2 ; R24.1@159.2,45.5 R24.1
  Top Layer w0.4: R24.1@159.2,45.5 R27.2 ; R24.1 159.4,45.3 v1(160.6,45.3)
  Bottom Layer w0.5: v3(136.3,63.2) 136.3,61.7 v3(139.2,58.8) ; v3(150,46.1) 151.9,44.2 159.5,44.2 v1(160.6,45.3)
NetR26_1: R26.1 U4.9 | length 1.9
  Top Layer w0.4: U4.9 152.575,64.275 153,64.7 R26.1
NetR26_2: R26.2 U6.5 | length 19.5
  Top Layer w0.4: v3(137.3,69.2) 137.45,69.35 U6.5
  Top Layer w0.5: v3(151.3,66.8) 151.6,66.5 R26.2
  Bottom Layer w0.5: v3(137.3,69.2) 139.1,71 143.6,71 145.5,69.1 147.7,69.1 150,66.8 v3(151.3,66.8)
NetR28_2: R28.2 TP3.1 U5.9 U6.14 | length 31.7
  Top Layer w0.3: U6.14 140.05,62.75 140.6,62.2 TP3.1 142.5,62.2 142.9,61.8 142.9,57.7 147,53.6 v3(148.7,53.6) ; U5.9 159.9,54 160.3,53.6 v3(160.6,53.6) 161.6,53.6 R28.2
  Bottom Layer w0.5: v3(148.7,53.6) v3(160.6,53.6)
NetR29_2: R29.2 U6.1 | length 1.8
  Top Layer w0.4: U6.1 140.55,70.75 R29.2
VBAT: C4.1 C11.1 C12.1 C15.2 L2.1 P1.1 R1.2 R2.2 R24.2 U1.10 U3.1 U3.3 U5.6 | length 229.8
  Top Layer w0.2: 127.2,61.2 127.6,61.2 130.3,63.9 130.3,68.2 130.3,68.6 ; U3.3@131.2,69.8 131,70 131,71.6 ; U3.3 131.3,69.6 131.2,69.5 130.3,68.6 ; 133.2,70.75 133.325,70.875 133.5,71.05 133.5,71.7 132.9,72.3 131.7,72.3 131,71.6 ; 130.3,68.6 130.3,68.8 130.9,69.4 130.9,71.5 131,71.6
  Top Layer w0.25: 136.3,52.7 136.3,52.5 136.6,52.2 C4.1 ; 136.3,52.7 136.3,53.03 ; 136.3,52.7 136.6,52.4 C4.1@137.4,52.4 ; 136.3,53.03 136.73,52.6 137.2,52.6 C4.1@137.4,52.4 ; 136.3,53.03 U1.10 136.1,52.4 136.5,52 137.4,52 C4.1 ; C4.1@137.4,52.4 C4.1
  Top Layer w0.3: U3.3@131.2,69.8 U3.3 ; C12.1 158.075,47.075 U5.6
  Top Layer w0.4: v3(124.4,51.2) 124.6,51.2 125.4,50.4 125.4,49.3 125.7,49 126.1,49 ; 125.7,49.8 125.7,49.4 126.1,49 ; 126.8,48.7 127.5,48.7 ; 126.1,49 126.5,49 127.2,49 127.5,48.7 ; 126.1,49 126.5,48.6 131.4,48.6 134.4,45.6 P1.1 ; 127.5,48.7 131.8,48.7 ; 131.8,48.7 P1.1 ; 131.8,48.7 132.3,48.7 134.9,46.1 P1.1
  Top Layer w0.5: v3(124.4,51.2) 125.3,52.1 125.3,59.8 129.7,64.2 129.7,67.6 130,67.9 ; v3@124.6,51.2 125.1,51.2 ; 126.8,48.7 126.5,49 125.7,49.8 125.7,50.6 ; v3(128.4,51.2) 128.5,51.1 R2.2 ; U3.3@131.2,69.8 131.2,69.5 131.2,69.1 130.3,68.2 130,67.9 ; U3.3 131.3,71.5 131.8,72 132.8,72 133.2,71.6 133.2,71 ; P1.1 136.5,47.2 136.5,48.5 ; P1.1@134.9,46.1 134.9,46.9 136.5,48.5 ; L2.1@140.7,53.6 140.6,53.6 139.212,52.212 139.212,52.2 140.212,51.2 L2.1@141.2,51.2 ; L2.1@141.225,49.2 L2.1@141.825,49.8 ; 125.1,51.2 125.7,51.8 ; 125.1,51.2 125.7,51.2 ; 125.1,51.2 125.7,50.6 ; 125.7,50.6 125.7,51.2 ; 125.7,51.2 125.7,51.8 ; 125.7,51.8 125.7,59.7 127.2,61.2 130,64 130,67.9 ; 133.2,70.6 133.7,70.1 134.4,70.1 C15.2 ; 133.2,70.6 U3.1 134.5,69.7 C15.2 ; 133.2,70.6 133.2,70.75 133.2,71 ; 133.2,71 133.325,70.875 133.7,70.5 134.4,70.5 134.65,70.25 C15.2 ; 136.5,48.5 R1.2 139.3,49.3 ; 139.3,49.3 L2.1@141.2,51.2 ; 139.3,49.3 139.925,49.3 L2.1 L2.1@141.2,51.2
  Top Layer w0.8: C4.1 139.212,52.2 140.825,52.2 L2.1 141.825,49.8 141.825,49.225 141.825,46.975 144.8,44 145.5,43.3 153.5,43.3 ; C12.1 157.8,45.05 C11.1 ; 152.8,44 153.5,43.3 ; 152.8,44 151.4,44 151.9,44.5 152.3,44.5 152.8,44 ; 153.5,43.3 156.3,43.3 ; 156.3,43.3 156.8,43.8 ; 156.3,43.3 158.6,43.3 R24.2@159.1,43.8 ; 156.8,43.8 R24.2@159.1,43.8 ; 156.8,43.8 157.65,44.65 C11.1 ; C11.1 158.55,44 R24.2 R24.2@159.1,43.8
  Top Layer w2: 141.825,46.975 140.45,45.6 138.2,45.6 ; L2.1@141.825,49.225 140.35,47.75 ; 142.8,45.2 141.6,44 ; 142.9,48.4 142.9,47.6 146.5,44 ; 151.4,44 146.5,44 ; P1.1@135.5,45.6 P1.1 136.5,44 141.6,44 ; P1.1@135.5,45.6 137.6,47.7 137.4,47.9 137.4,48.3 139,48.3 139.1,48.4 139.7,48.4 140.35,47.75 ; P1.1@135.5,45.6 138.2,45.6 ; 138.2,45.6 140.35,47.75 ; 141.6,44 144.8,44 146.5,44
  Bottom Layer w0.5: v3(124.4,51.2) v3(128.4,51.2) ; P1.1@134,45.6 P1.1
VCHG: C2.1 C3.1 D3.2 R3.2 R5.1 R7.2 R9.2 U1.1 | length 76.5
  Top Layer w0.25: U1.1@136.1,55.3 136.1,55.6 136.7,56.2 137,56.2 C3.1 C3.1@137.4,56 ; U1.1@136.1,55.3 136.8,56 C3.1@137.4,56 ; U1.1@136.1,55.3 U1.1 136.27,55.17 136.9,55.8 137.2,55.8 C3.1@137.4,56
  Top Layer w0.5: 113.1,69.1 113.7,69.1 R9.2 113.025,69.6 D3.2 112.4,71.4 114.2,73.2 R7.2 ; v3(131.2,50.8) 131.3,50.7 R5.1
  Top Layer w0.6: R3.2 R9.2 ; 136.8,56 137,56.2 137.1,56.3 v3(137.1,57.3)
  Top Layer w0.8: D3.2 112.4,68.9 v3(112.6,68.7) ; C3.1 C3.1@137.6,56.4 ; C3.1@137.6,56.4 137.6,56.8 v3(137.1,57.3) v3(138.5,57.3) C3.1@137.6,56.4
  Top Layer w1: v3(112.6,68.7) v3(112.6,67.4) ; 113.1,69.1 R3.2 ; v3(112.6,67.4) 112.9,67.1 113.3,67.1 ; v3(112.6,67.4) 112.6,66.85 C2.1 ; v3(112.6,67.4) 113.2,68 R3.2 ; C2.1 113.3,67.1 ; C2.1 114.2,67.05 R3.2 ; 113.3,67.1 R3.2
  Bottom Layer w0.5: v3(131.2,50.8) 132.4,50.8 137.1,55.5 v3(137.1,57.3)
  Bottom Layer w1: v3(112.6,67.4) 112.6,65.8 114.6,63.8 118.5,63.8 122.4,59.9 134.5,59.9 v3(137.1,57.3)
  Bottom Layer w1.2: v3(112.6,67.4) v3(112.6,68.7) ; v3(137.1,57.3) v3(138.5,57.3)
pads on no net: J1.0 U5.16

## Polygon pours and split planes (outlines as drawn)
GND on Bottom Layer "GND BOT" (solid, remove dead copper, pour order 2): 109.7,74.7 163,74.7 163,42.4 109.7,42.4
GND on Top Layer "GND TOP" (solid, remove dead copper, pour order 0): 109.7,74.7 163,74.7 163,42.4 109.7,42.4

## Other copper
Top Layer:
  pour cut-out: 158,70.9 158,70.2 157.9,70.2 157.9,70.9
  pour cut-out: 158.4,67.3 158.4,66 158.3,66 158.3,67.3
  pour cut-out: 153.8,53.4 154.6,53.4 154.6,53.3 153.8,53.3
  pour cut-out: 143.7,54 143.7,55.6 143.603,55.6 143.599,55.596 143.6,55.595 143.6,54
  pour cut-out: 151.5,48.3 151.5,45.1 151.4,45.1 151.4,48.3
  pour cut-out: 117.5,58.4 119.6,58.4 119.6,58.3 117.5,58.3 117.5,58.506 117.45,58.556
  pour cut-out: 123,48.6 126.1,48.6 126.1,48.5 123,48.5
  pour cut-out: 119.3,64.3 118.6,64.3 118.6,64.4 119.3,64.4
  pour cut-out: 114.6,65.5 115.3,65.5 115.3,65.4 115.296,65.396 114.6,65.396 114.6,65.5

## Silkscreen, mask and mechanical layers (free items; w line width, h text height)
Top Overlay:
  circle w0.254: c127.73,58.44 r0.37
  text "Solar USB" at 118,72.8 h1.2
  text "Charger" at 119,70.9 h1.2
  text "11.2017, Australia" at 110.4,61.2 h1 r270
  text "-" at 115.4,42.9 h1.5
  text "+" at 117,42.9 h1.5
  text "-" at 129.6,42.9 h1.5
  text "+" at 131.2,42.9 h1.5